# Altium PCB AP1301_20130621.PcbDoc
Units mm, origin at the board's own origin, x right, y up, seen from the top; angles counter-clockwise.
Board outline 111 x 32.5 mm, 2 copper layers (Top Layer, Bottom Layer), stack 1.601 mm thick; 65 components, 47 nets, 190 pads, 71 vias.
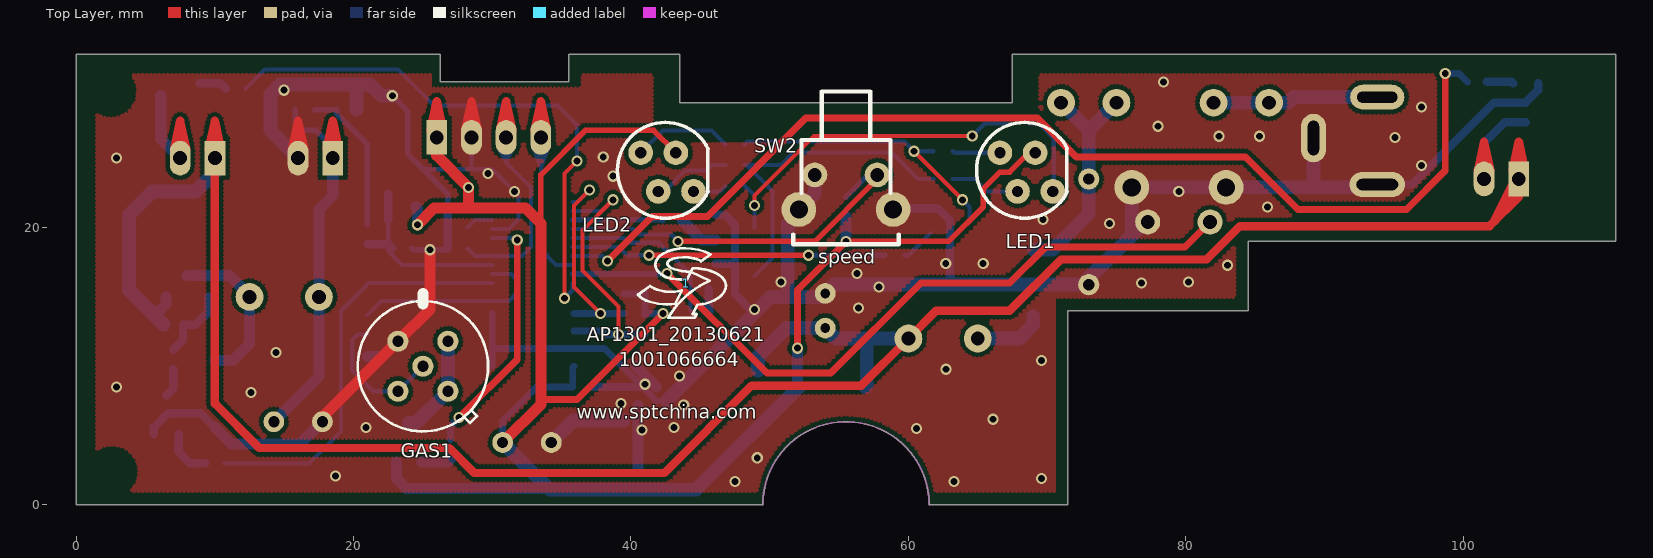
[diagram p0: Top Layer view]
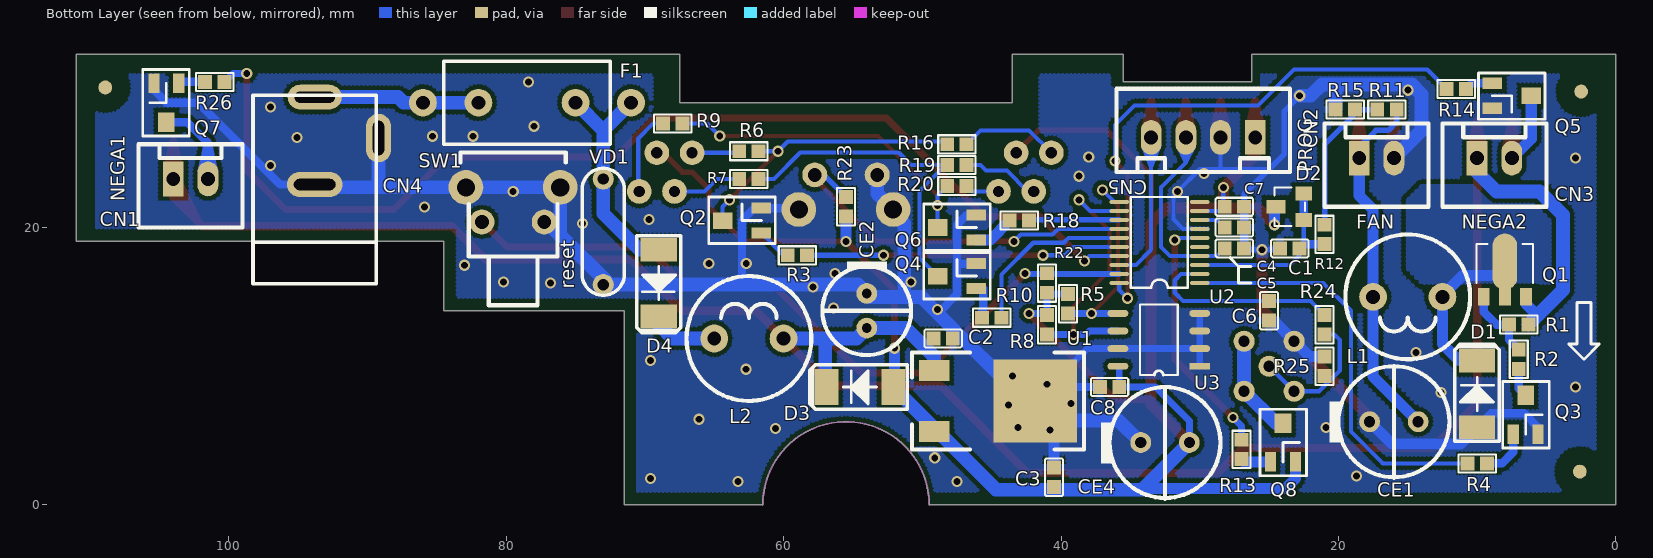
[diagram p1: Bottom Layer view, seen from below]

## Layer stack, top to bottom
Top Layer: signal copper 0.0356
Dielectric: core 1.53, FR-4, Dk 4.8
Bottom Layer: signal copper 0.0356

## Board outline
0,0 49.5,0 cw(c55.5,0) 61.5,0 71.5,0 71.5,14 84.5,14 84.5,19 111,19 111,32.5 67.5,32.5 67.5,29 43.5,29 43.5,32.5 35.5,32.5 35.5,30.5 26.25,30.5 26.25,32.5 0,32.5

## Design rules (kind name [scope] priority, off if disabled: settings)
Clearance Clearance_1 [All] p1: gap=0.3
FabricationTestPointUsage TestPointUsage [All] p1: valid=0 allowmultiple=FALSE
FabricationTestpoint Testpoint [All] p1: side=3 testpointundercomponent=TRUE minsize=1.016 maxsize=2.54 preferedsize=1.524 minholesize=0 maxholesize=1.016 preferedholesize=0.813 testpointgrid=0.025 allowsidetop=TRUE allowsidebottom=TRUE usegrid=TRUE gridtolerance=0
PlaneConnect [All] p1: planeconnectstyle=Relief reliefexpansion=0.508 reliefentries=4 reliefconductorwidth=0.4 reliefairgap=0.4
PolygonConnect PolygonConnect_1 [(HasFootprint('0603-C') OR HasFootprint('0603-R'))] p1: connectstyle=Relief reliefconductorwidth=0.5 reliefentries=4 polygonreliefangle="90 Angle" airgapwidth=0.254
PolygonConnect [All] p2: connectstyle=Direct reliefconductorwidth=0.5 reliefentries=4 polygonreliefangle="90 Angle" airgapwidth=0.254
RoomDefinition AP1301_20130621 [InComponentClass('AP1301_20130621')] p1: confinementstyle=ConfineIn formatcopy=TRUE lockcomponents=FALSE outline 112.192,1.481 121.691,1.481 121.691,9.481 112.192,9.481
RoutingVias [All] p1: holewidth=0.5 width=0.8 viastyle="Through Hole" minholewidth=0.5 minwidth=0.8 maxholewidth=4 maxwidth=5
SilkToSolderMaskClearance SilkscreenOverComponentPads [IsPad] p1: minsilkscreentomaskgap=0.254 clearancetoexposedcopper=TRUE
SolderMaskExpansion [All] p1: expansion=0.102
Width [All] p1: maxlimit=5 minlimit=0.25 preferedwidth=0.25
24 further rules are at their usual default settings.

## Components (designator, comment, footprint, x,y, rotation, side; value= is the part's Value field where it differs from the comment)
1 "AP1301_20130621" "SPT Mark" 44,16 r0 top
C1 "102" 0603-C 23.5,18.5 r0 bottom
C2 "104" 0603-C 48.5,12 r180 bottom
C3 "104" 0603-C 40.5,2 r90 bottom
C4 "104" 0603-C 27.5,18.5 r180 bottom
C5 "104" 0603-C 27.5,21.5 r180 bottom
C6 "104" 0603-C 25,14 r270 bottom
C7 "105" 0603-C 27.5,20 r0 bottom
C8 "104" 0603-C 36.5,8.5 r0 bottom
CE1 "470uF/25V" 电解电容3.5-8.0 16,6 r180 bottom
CE2 "47uF/50V" 电解电容2.5-6.3 54,14 r180 bottom
CE4 "470uF/16V" 电解电容3.5-8.0 32.5,4.5 r180 bottom
CN1 "NEGA1" XH-2 104,23.5 r0 bottom
CN2 "FAN" XH-2 18.5,25 r0 bottom
CN3 "NEGA2" XH-2 10,25 r0 bottom
CN4 "POWER" DC电源插座 93.8,29.4 r90 bottom locked
CN5 "PROG" XH-4 26,26.5 r0 bottom
D1 "SS14" 二极管_贴片 10,8 r90 bottom
D2 "BAV70" SOT23-D 23.5,21.5 r90 bottom
D3 "M7" 二极管_贴片 54.5,8.5 r0 bottom
D4 "SS24" 二极管_贴片 69,16 r270 bottom
F1 "250V/2A" 保险丝-2A/250 78.5,29 r180 bottom
GAS1 "费加罗TGS2600" 费加罗TGS6200 25,10 r0 top locked
L1 "220uH" 电感LG2-P5-D9 15,15 r0 bottom
L2 "" 电感LG2-P5-D9 62.5,12 r180 bottom
LED1 "TRILED" 三色灯2 68.5,24 r0 top locked
LED2 "TRILED" 三色灯2 42.6,24 r0 top locked
Q1 "2SA1213" 2SC2873 8,15 r180 bottom
Q2 "8050" 贴片三极管-宽 63,20.5 r90 bottom
Q3 "8050" 贴片三极管-宽 6.5,6.5 r180 bottom
Q4 "8050" 贴片三极管-宽 47.5,16.5 r90 bottom
Q5 "8050" 贴片三极管-宽 7.5,29.5 r270 bottom
Q6 "8050" 贴片三极管-宽 47.5,20 r90 bottom
Q7 "8050" 贴片三极管-宽 104.5,29 r0 bottom
Q8 "8550" 贴片三极管-宽 24,4.5 r180 bottom
R1 "10k" 0603-R 7,13 r180 bottom
R2 "2k" 0603-R 7,10.5 r90 bottom
R3 "2k" 0603-R 59,18 r0 bottom
R4 "2k" 0603-R 10,3 r180 bottom
R5 "10k" 0603-R 39.5,14.5 r90 bottom
R6 "510" 0603-R 62.5,25.5 r0 bottom
R7 "510" 0603-R 62.5,23.5 r0 bottom
R8 "10k" 0603-R 41,13 r90 bottom
R9 "510" 0603-R 68,27.5 r0 bottom
R10 "2k" 0603-R 45,13.5 r0 bottom
R11 "9.1k 1%" 0603-R 16.5,28.5 r0 bottom
R12 "1k" 0603-R 21,19.5 r270 bottom
R13 "1k" 0603-R 27,4 r270 bottom
R14 "1k" 0603-R 11.5,30 r180 bottom
R15 "6.8k 1%" 0603-R 19.5,28.5 r0 bottom
R16 "510" 0603-R 47.5,26 r180 bottom
R18 "2k" 0603-R 43,20.5 r0 bottom
R19 "510" 0603-R 47.5,24.5 r180 bottom
R20 "510" 0603-R 47.5,23 r180 bottom
R22 "10k" 0603-R 41,16 r90 bottom
R23 "10k" 0603-R 55.5,21.5 r90 bottom
R24 "1k" 0603-R 21,13 r90 bottom
R25 "100k 1%" 0603-R 21,10 r90 bottom
R26 "1k" 0603-R 101,30.5 r0 bottom
SW1 "reset" 按键-卧式_6*6*3.5 79.5,20.4 r0 bottom
SW2 "speed" 按键-卧式_6*6*5.8 55.5,23.8 r0 top locked
U1 "78M05" 78M05_TO-252 45.5,7.5 r270 bottom
U2 "STM8S003F3" STM8S103F2P6 30,16 r0 bottom
U3 "AT24C02" SOIC8 30,10 r0 bottom
VD1 "10D270K" C-7.6A 73,23.5 r90 bottom

## Footprints (in the part's own frame and the unit in brackets; to place one, negate y for a bottom-side part, rotate by r counter-clockwise, add the part's x,y. Pads: shape width x height; smd on the part's side, far side on the other; paste and mask are expansions set on the pad)
2SC2873 [mil]
  rect 34x50 smd: B(-60,0) C(0,0) E(60,0)
  oval 70x160 smd: C(0,100)
  silkscreen extent -80,40 80,150
78M05_TO-252 [mm]
  rect 1.5x2.2 smd: 1(-2.2,-3.65) 3(2.2,-3.65)
  rect 6x6 smd: 2(0,3.65)
  silkscreen extent -3.5,-5.25 3.5,7.15
0603-C [mm]
  rect 1x1 smd: 1(-0.7,0) 2(0.7,0)
  silkscreen extent -1.35,-0.65 1.35,0.65
0603-R [mm]
  rect 1x1 smd: 1(-0.7,0) 2(0.7,0)
  silkscreen extent -1.35,-0.65 1.35,0.65
C-7.6A [mil]
  round 60 hole 32: 1(0,0) 2(-300,0)
  silkscreen extent -330,-60 30,60
DC电源插座 [mm]
  oval 1.8x3.9 hole 0.8 slot 2.9 at 90 deg: 1(0,0)
  oval 3.5x1.8 hole 0.8 slot 2.5 at 0 deg: 2(-2.95,-4.6)
  oval 1.8x4 hole 0.8 slot 3 at 90 deg: 3(-6.3,0)
  silkscreen extent -13.45,-4.45 0.15,4.45, body extent -13.5,-4.5 0.2,4.5, height 11
SOIC8 [mm]
  rect 1.5x0.5 smd: 1(0,0)
  oval 1.5x0.5 smd: 2(0,-1.27) 3(0,-2.54) 4(0,-3.81) 5(5.9,-3.81) 6(5.9,-2.54) 7(5.9,-1.27) 8(5.9,0)
  silkscreen extent 1.58,-4.44 4.32,0.64
SOT23-D [mm]
  rect 1x1.2 smd: 1(-0.95,-1) 2(0.95,-1)
  rect 1x1.4 smd: 3(0,1)
  silkscreen extent -1.4,-1.1 1.4,1.1
"SPT Mark" [mm]
  silkscreen extent -3.49,-2.5 2.84,2.5
STM8S103F2P6 [mm]
  oval 1.4x0.3 smd: 1(0,0) 2(0,-0.65) 3(0,-1.3) 4(0,-1.95) 5(0,-2.6) 6(0,-3.25) 7(0,-3.9) 8(0,-4.55) 9(0,-5.2) 10(0,-5.85) 11(5.8,-5.85) 12(5.8,-5.2) 13(5.8,-4.55) 14(5.8,-3.9) 15(5.8,-3.25) 16(5.8,-2.6) 17(5.8,-1.95) 18(5.8,-1.3) 19(5.8,-0.65) 20(5.8,0)
  silkscreen extent 0.85,-6.2 4.97,0.35
XH-2 [mm]
  rect 1.5x2.5 hole 1: 1(0,0)
  oval 1.5x2.5 hole 1: 2(-2.5,0)
  silkscreen extent -5,-2.5 2.5,3.5, body extent -5.1,-2.6 2.6,3.6, height 7.5
XH-4 [mm]
  rect 1.5x2.5 hole 1: 1(0,0)
  oval 1.5x2.5 hole 1: 2(2.5,0) 3(5,0) 4(7.5,0)
  silkscreen extent -2.5,-3.5 10,2.5, body extent -2.6,-3.6 10.1,2.6, height 7.5
三色灯2 [mil]
  round 70 hole 32: 1(25,55) 2(-75,55) 3(-25,-55) 4(75,-55)
  silkscreen extent -141,-131 117,141
二极管_贴片 [mm]
  rect 1.7x2.6 smd: A(-2.4,0) K(2.4,0)
  silkscreen extent -3.4,-1.6 3.6,1.6
保险丝-2A/250 [mm]
  round 2 hole 1: 1(-7.5,0) 2(-3.5,0) 3(3.5,0) 4(7.5,0)
  silkscreen extent -6,-3 6,3
按键-卧式_6*6*3.5 [mm]
  round 1.8 hole 1: 1(-2.25,0) 2(2.25,0)
  round 2.5 hole 1.3: 3(3.4,-2.5) 4(-3.4,-2.5)
  silkscreen extent -3.8,-5 3.8,6, body extent -3.8,-5 3.8,6.03, height 11.5
按键-卧式_6*6*5.8 [mm]
  round 1.8 hole 1: 1(-2.25,0) 2(2.25,0)
  round 2.5 hole 1.3: 3(3.4,-2.5) 4(-3.4,-2.5)
  silkscreen extent -3.8,-5 3.8,6, body extent -3.8,-5 3.8,8.33, height 11.5
电感LG2-P5-D9 [mm]
  round 2 hole 1: 1(-2.5,0) 2(2.5,0)
  silkscreen extent -4.5,-4.5 4.5,4.5, body extent -4.5,-4.5 4.46,4.48, height 12.5
电解电容2.5-6.3 [mm]
  round 1.5 hole 0.711: 1(0,-1.25) 2(0,1.25)
  silkscreen extent -3.2,-3.2 3.2,3.55, body extent -3.2,-3.3 3.17,3.09, height 11.5
电解电容3.5-8.0 [mm]
  round 1.5 hole 0.8: 1(1.75,0) 2(-1.75,0)
  silkscreen extent -4.63,-4.06 4,4, body extent -4,-4 3.97,3.98, height 11.5
贴片三极管-宽 [mm]
  rect 0.8x1.4 smd: B(-0.9,-1.4) E(0.9,-1.4)
  rect 1.2x1.4 smd: C(0,1.4)
  silkscreen extent -1.65,-2.4 1.7,2.4
费加罗TGS6200 [mil]
  round 60 hole 31.5: 1(-70.98,70.98) 2(-70.98,-70.98) 3(70.98,-70.98) 4(70.98,70.98) 5(0,0)
  silkscreen extent -185,-185 185,207, body extent -185,-185 184,184, height 315

## Part data
1: library part "SPT MARK"
C1 C2 C3 C4 C5 C6 C7 C8: library part 电容
CE1 CE2 CE4: library part 电解电容
CN1 CN2 CN3: library part 插座-2
CN4: library part CON3, "Connector"
CN5 LED1 LED2: library part CON4, "Connector"
D1 D3 D4: library part 二极管-W
F1: library part 保险丝-双
GAS1: library part 费加罗TGS6200
L1: library part 电感-1
L2: library part INDUCTOR
Q1 Q8: library part 三极管-PNP
Q2 Q3 Q4 Q5 Q6 Q7: library part 三极管-NPN
R1 R2 R3 R4 R5 R6 R7 R8 R9 R10 R11 R12 R13 R14 R15 R16 R18 R19 R20 R22 R23 R24 R25 R26: library part 电阻
SW1 SW2: library part 按键-2
U1: library part KA7805, "IC?"
U2: library part STM8S103F2P6
VD1: library part 压敏电阻

## Free pads (board coordinates)
  round 1 smd far side: 1(2.5,29.8) 1(2.6,2.4) 1(108.9,30.1)
  round 3 on Bottom Solder: 2(2.5,29.8) 2(2.6,2.4) 2(108.7,29.6) 2(108.7,30.2) 2(108.9,30.1)
  round 3 on Keep-Out: 3(2.5,29.8) 3(2.6,2.4) 3(108.9,30.1)

## Via types
v1: diameter 0.8, hole 0.5, Top Layer to Bottom Layer, 71 vias

## Nets (pads, with @x,y where several pads share a name; then routed paths per layer and width w, separated by ;. In a path a pad name is that pad's centre, name@x,y a point inside that pad or via, vN(x,y) a via of type N, cw(c..) or ccw(c..) an arc to the next point about the centre after c; other vN are vias at no path point)
+5V: C3.1 C5.1 C8.1 CE4.1 CN5.1 D2.3 D3.A LED1.1 LED2.1 Q8.E R5.2 R8.2 R22.1 R23.1 U1.3 U2.9 U3.8 | length 171.6
  Top Layer w0.4: 33.5,20.3 33.5,23.8 36.7,27 41.632,27 LED2.1 ; v1(55.5,19) 62.9,19 65.4,21.5 65.4,22.8 66.592,23.992 67.292,23.992 68.697,25.397 LED1.1
  Top Layer w0.5: 33.5,7.25 33.85,7.6 36.1,7.6 v1(42.3,13.8) ; v1(52,11.3) 52,15.5 v1(55.5,19)
  Top Layer w0.6: CN5.1@25.553,27.048 26,29.1 ; CN5.1@26,27 26,29.1 ; CN5.1@26.447,27.048 26,29.1 ; CN5.1@25.552,26.946 26,29.1 ; CN5.1@25.552,26.946 26,29.1 ; CN5.1@25.552,26.946 26,29.1 ; CN5.1@26,26.9 26,29.1 ; CN5.1@26,26.9 26,29.1 ; CN5.1@26,26.9 26,29.1 ; 26,29.1 CN5.1@26.448,26.946 ; 26,29.1 CN5.1@26.448,26.946 ; 26,29.1 CN5.1@26.448,26.946
  Top Layer w0.8: v1(24.6,20.2) 25.8,21.4 28.3,21.4 ; 26,25.2 v1(28.3,22.9) 28.3,21.4 ; CE4.1 33.5,7.25 33.5,20.3 32.4,21.4 28.3,21.4
  Bottom Layer w0.3: C5.1@28.3,21.4 28.5,21.2 U2.9 ; C5.1@28.3,21.5 v1(28.3,22.9)
  Bottom Layer w0.5: CE4.1 30.75,6.05 33.2,8.5 C8.1 35.8,9.9 U3.8 ; R5.2 40.9,15.2 R22.1 R8.2 41.1,13.8 v1(42.3,13.8)
  Bottom Layer w0.8: Q8.E 23.1,1.9 23.8,1.2 34.05,1.2 34.15,1.1 ; D2.3 24.6,21.4 v1(24.6,20.2) ; v1(52,11.3) 52,8.6 D3.A ; v1(55.5,19) R23.1
  Bottom Layer w1: CE4.1 34.05,1.2 ; 34.15,1.1 44.7,1.1 D3.A
+12V: C2.1 CE2.1 CN1.1 CN3.1 D3.K L2.2 Q1.E R1.2 U1.1 | length 200.9
  Top Layer w0.6: CN3.1@9.553,25.648 10,27.7 ; CN3.1 10,7.3 13.2,4.1 26.9,4.1 28.7,2.3 42.4,2.3 48.7,8.6 56.6,8.6 L2.2 62,14 67.3,14 71,17.7 81.5,17.7 83.9,20.1 101.9,20.1 104,22.2 CN1.1 ; CN3.1@10,25.6 10,27.7 ; CN3.1@10.447,25.648 10,27.7 ; CN1.1@103.553,24.148 104,26.2 ; CN1.1@103.613,23.229 102.193,20.393 ; CN1.1@104,23 102.193,20.393 ; CN1.1@104,24.1 104,26.2 ; CN1.1@104.351,22.718 102.193,20.393 ; CN1.1@104.447,24.148 104,26.2 ; CN1.1@103.552,24.046 104,26.2 ; CN1.1@103.552,24.046 104,26.2 ; CN1.1@103.552,24.046 104,26.2 ; CN1.1@104,24 104,26.2 ; CN1.1@104,24 104,26.2 ; CN1.1@104,24 104,26.2 ; 104,26.2 CN1.1@104.448,24.046 ; 104,26.2 CN1.1@104.448,24.046 ; 104,26.2 CN1.1@104.448,24.046
  Bottom Layer w0.8: 5.65,13.65 6.476,14.476 Q1.E
  Bottom Layer w1: R1.2 5.65,13.65 3.8,15.5 3.8,20.9 5.5,22.6 8.6,22.6 10,24 CN3.1 ; U1.1 49.15,10.7 51.2,12.75 CE2.1 54.75,12 57,12 ; D3.K 57,8.6 57,12 ; L2.2 57,12
+12V_IN: CN4.1 F1.1 F1.2 | length 14.6
  Bottom Layer w1: F1.2 F1.1 ; 83.4,29 F1.1 ; CN4.1 87.8,29.4 87.4,29 F1.1
AD_VFAN: C1.1 D2.1 D2.2 R12.2 U2.3 | length 14
  Bottom Layer w0.3: D2.1 22.5,18.8 22.5,18.3 23.5,17.3 U2.3
  Bottom Layer w0.6: R12.2 22.5,18.8 C1.1 ; D2.1 D2.2
EE_SCL: R8.1 U2.12 U3.6 | length 20.1
  Top Layer w0.3: v1(38.7,22) 36.5,19.8 36.5,16.9 39.1,14.3 v1(39.1,12.3)
  Bottom Layer w0.3: U2.12 37.9,21.2 v1(38.7,22)
  Bottom Layer w0.5: U3.6 37.96,12.54 38.2,12.3 v1(39.1,12.3) R8.1
EE_SDA: R5.1 U2.11 U3.5 | length 15.3
  Top Layer w0.3: v1(37.017,22.717) 35.9,21.6 35.9,15.7 v1(37.8,13.8)
  Bottom Layer w0.3: U2.11 36.15,21.85 v1(37.017,22.717)
  Bottom Layer w0.5: U3.5 35.91,13.8 v1(37.8,13.8) R5.1
GAS: C6.1 R24.2 U2.2 | length 14.3
  Bottom Layer w0.3: R24.2 22,14.7 31.2,14.7 31.8,15.3 31.8,16.2 31.35,16.65 U2.2
GAS_POWER: R13.1 U2.6 | length 18.3
  Top Layer w0.5: v1(27.6,6.3) 31.8,10.5 v1(31.8,19.1)
  Bottom Layer w0.3: U2.6 31.65,19.25 v1(31.8,19.1)
  Bottom Layer w0.5: R13.1 27,5.7 v1(27.6,6.3)
GND: C1.2 C2.2 C3.2 C4.2 C5.2 C6.2 C7.1 C8.2 CE1.2 CE2.2 CE4.2 CN2.2 CN4.2 CN4.3 CN5.2 D1.A GAS1.1 Q2.E Q3.E Q4.E Q5.E Q6.E Q7.E R15.2 R25.2 SW1.1 SW1.3 SW1.4 SW2.1 SW2.3 SW2.4 U1.2 U2.7 U3.1 U3.2 U3.3 U3.4 U3.7 VD1.2 | length 263.6
  Top Layer w0.6: CN2.2@15.553,25.648 16,27.7 ; CN2.2@16,25.6 16,27.7 ; CN2.2@16.447,25.648 16,27.7 ; CN5.2@28.053,27.048 28.5,29.1 ; CN5.2@28.5,27 28.5,29.1 ; CN5.2@28.947,27.048 28.5,29.1 ; CN5.2@28.052,26.946 28.5,29.1 ; CN5.2@28.052,26.946 28.5,29.1 ; CN5.2@28.052,26.946 28.5,29.1 ; CN5.2@28.5,26.9 28.5,29.1 ; CN5.2@28.5,26.9 28.5,29.1 ; CN5.2@28.5,26.9 28.5,29.1 ; 28.5,29.1 CN5.2@28.948,26.946 ; 28.5,29.1 CN5.2@28.948,26.946 ; 28.5,29.1 CN5.2@28.948,26.946
  Top Layer w0.8: CE1.2 17.75,6.356 GAS1.1 25.5,14.106 v1(25.5,18.4)
  Bottom Layer w0.3: 25,24.2 28.5,24.2 ; CN5.2 28.5,24.2 ; U2.7 31.2,19.9 31.9,20.6 31.9,22.3 v1(31.608,22.592) 30,24.2 28.5,24.2
  Bottom Layer w0.4: v1(22.792,29.5) 23.9,28.392 23.9,27.2 23.9,25.3 25,24.2 26.8,22.4 C5.2 ; C1.2 24.3,18.4 v1(25.5,18.4) 26.7,18.4 C4.2
  Bottom Layer w0.5: U3.1 U3.2 ; U3.4 U3.3 U3.2 ; U1.2 40.85,8.5 38.08,11.27 U3.7 U3.2
  Bottom Layer w0.6: Q3.E 5.6,5.6 6.6,6.6 9,6.6 D1.A ; C4.2 C7.1 C5.2 ; C8.2 U1.2@40.85,8.5 ; Q4.E 47.5,17.4 ; Q6.E 46.8,20.9 47.5,20.2 47.5,17.4 ; v1@48.884,13.816 47.5,15.2 47.5,17.4 ; SW2.3 59,21.4 Q2.E 62.1,21.4 63,20.5 63,16.38 63.5,15.88 ; CN4.3 96.3,23.1 102.2,29 104.5,29 105.4,29.9 Q7.E
  Bottom Layer w0.8: D1.A 11.2,4.4 16.15,4.4 CE1.2 ; R25.2 22.094,10.7 GAS1.1 23.847,12.453 C6.2@24.647,13.253 ; U1.2@40.35,10 U1.2@41.85,8.5 ; C3.2 U1.2@40.5,7.15
  Bottom Layer w1: CN2.2 14,27 14,29.6 14.7,30.3 20.2,30.3 ; R15.2 20.2,30.3 ; v1(22.792,29.5) 22,29.5 21.2,30.3 20.2,30.3 ; CE4.2 35.85,6.1 U1.2@39.45,6.1 ; U1.2@42.569,7.5 48.884,13.816 50.069,15 51.2,15 ; SW2.1 53.25,22.45 SW2.4 52.1,21.1 51.3,20.3 51.3,15.1 51.2,15 ; 66.48,15.88 67.7,15.88 ; VD1.2@72.73,15.88 VD1.2@72.5,15.88 ; CN4.2 89.2,23 89.3,22.9 ; CN4.3@92.55,23.1 CN4.3@93.2,23.1 ; CN4.3 CN4.3@93.2,23.1 ; 51.2,15 53.75,15 CE2.2 54.63,15.88 63.5,15.88 67.7,15.88 ; 67.7,15.88 VD1.2@72.5,15.88 ; VD1.2@72.5,15.88 72.58,15.88 77.1,20.4 SW1.1 76.1,20.4 ; VD1.2@72.5,15.88 76.1,19.48 76.1,20.4 ; 76.1,20.4 SW1.4 SW1.3 89.3,22.9 ; 89.3,22.9 93,22.9 CN4.3@93.2,23.1
  other v1: 47.5,1.681 63.292,1.7 69.592,1.9 18.7,2.1 49.1,3.4 40.8,5.4 60.592,5.5 20.9,5.581 43.1,5.581 66.1,6.181 43.8,7.2 39.292,7.3 12.592,8.1 2.9,8.5 41,8.7 43.5,9.3 62.7,9.781 69.592,10.4 14.4,10.981 48.892,14.1 56.392,14.2 57.892,15.7 76.792,16 50.8,16.081 80.2,16.081 56.3,16.681 83,17.281 62.692,17.4 65.392,17.4 74.5,20.281 69.7,20.581 85.9,21.481 79.492,22.6 38.692,23.7 29.692,23.9 97,24.481 2.9,25 38,25.081 95.092,26.5 82.4,26.581 85.3,26.581 77.992,27.3 97,28.681 14.992,29.9 78.4,30.481
KEY_FILTER_RESET: R22.2 SW1.2 U2.19 | length 53.4
  Top Layer w0.5: v1(42.6,16.7) 49.8,9.5 54.4,9.5 60.9,16 67.3,16 69.9,18.6 79.95,18.6 SW1.2
  Bottom Layer w0.4: U2.19 v1@42.6,16.65
KEY_SPEED: R23.2 SW2.2 U2.14 | length 27.4
  Top Layer w0.4: v1(43.4,19) 53.25,19 57.75,23.5 SW2.2
  Bottom Layer w0.3: U2.14 40.2,19.9 40.6,19.5 42.9,19.5 v1(43.4,19)
  Bottom Layer w0.4: R23.2 57.1,23.8 SW2.2
NEGA1: R26.1 U2.17 | length 81.6
  Top Layer w0.5: v1(38.3,17.6) 41.5,20.8 45.5,20.8 52.6,27.9 69.3,27.9 72.1,25.1 84.3,25.1 88.1,21.3 95.9,21.3 98.7,24.1 v1(98.7,31.1)
  Bottom Layer w0.3: 37.35,17.95 U2.17 37.95,17.95 v1(38.3,17.6)
  Bottom Layer w0.5: v1(98.7,31.1) 99.7,31.1 R26.1
NEGA2: R14.1 U2.20 | length 40.4
  Top Layer w0.3: v1(35.2,14.9) 35.2,23.9 v1(36.1,24.8)
  Bottom Layer w0.3: R14.1 13.6,31.4 23.2,31.4 25.8,28.8 34.7,28.8 36.1,27.4 v1(36.1,24.8) ; v1(35.2,14.9) 35.8,15.5 U2.20
NetC7_2: C7.2 U2.8 | length 2
  Bottom Layer w0.3: C7.2 28.75,20.55 U2.8
NetCN1_2: CN1.2 Q7.C | length 18.8
  Top Layer w0.6: CN1.2@101.053,24.148 101.5,26.2 ; CN1.2@101.5,24.1 101.5,26.2 ; CN1.2@101.947,24.148 101.5,26.2
  Bottom Layer w0.6: CN1.2@101.053,24.048 101.5,26.1 ; CN1.2 101.5,26.1 ; CN1.2@101.5,24 101.5,26.1 ; CN1.2@101.947,24.048 101.5,26.1 ; Q7.C 103,27.6 101.5,26.1
NetCN3_2: CN3.2 Q5.C | length 11.4
  Top Layer w0.6: CN3.2@7.053,25.648 7.5,27.7 ; CN3.2@7.5,25.6 7.5,27.7 ; CN3.2@7.947,25.648 7.5,27.7
  Bottom Layer w0.8: Q5.C 6.1,26.4 CN3.2
NetD1_K: D1.K L1.1 Q1.C | length 11.6
  Bottom Layer w0.8: Q1.C@8,16.54 11.06,16.54 12.5,15.1 L1.1 12.5,11.6 11.3,10.4 D1.K
NetD4_A: D4.A F1.3 F1.4 VD1.1 | length 16.7
  Bottom Layer w1: D4.A 70.4,18.4 73,21 VD1.1 73,27 ; F1.4 73,27 ; F1.3 73,27
NetD4_K: D4.K L2.1 | length 5
  Bottom Layer w1: L2.1 68,12 69,13 D4.K
NetGAS1_2: GAS1.2 GAS1.5 R24.1 R25.1 | length 9.9
  Bottom Layer w0.3: R24.1 20.3,12.3 19.9,11.9 19.9,9.7 21.403,8.197 GAS1.2 GAS1.5
NetGAS1_3: GAS1.3 GAS1.4 Q8.C | length 7.4
  Bottom Layer w1: Q8.C 24.506,5.9 GAS1.3 GAS1.4
NetLED1_2: LED1.2 R6.2 | length 3.4
  Bottom Layer w0.3: R6.2 63.303,25.397 LED1.2
NetLED1_3: LED1.3 R7.2 | length 5
  Bottom Layer w0.3: R7.2 64.8,23.5 65.697,22.603 LED1.3
NetLED1_4: LED1.4 R9.2 | length 6.5
  Bottom Layer w0.3: R9.2 69.4,27.5 70.474,26.426 70.474,22.672 LED1.4 LED1.4@70.405,22.205
NetLED2_2: LED2.2 R16.2 | length 7.2
  Bottom Layer w0.3: LED2.2 42.298,27 45.8,27 R16.2
NetLED2_3: LED2.3 R19.2 | length 5.6
  Bottom Layer w0.3: LED2.3 42.403,22.603 43.9,24.1 45.4,24.1 45.8,24.5 R19.2
NetLED2_4: LED2.4 R20.2 | length 2.5
  Bottom Layer w0.3: LED2.4 46.403,22.603 R20.2
NetQ1_B: Q1.B R1.1 R2.2 | length 5.4
  Bottom Layer w0.6: R2.2 7.7,11.9 R1.1 8.6,13 9.524,13.924 Q1.B
NetQ2_B: Q2.B R3.2 | length 2.6
  Bottom Layer w0.3: R3.2 60,18 Q2.B
NetQ2_C: Q2.C R6.1 R16.1 | length 20.6
  Top Layer w0.3: v1(60.4,25.5) v1(63.9,22)
  Bottom Layer w0.3: R16.1 48.4,26.2 59.7,26.2 v1(60.4,25.5) R6.1 ; v1(63.9,22) 64.4,21.5 Q2.C
NetQ3_B: Q3.B R4.2 | length 3.5
  Bottom Layer w0.6: Q3.B 7.4,3.8 8.2,3 R4.2
NetQ3_C: Q3.C R2.1 | length 2.1
  Bottom Layer w0.6: Q3.C 7,8.4 R2.1
NetQ4_B: Q4.B R10.2 | length 1.6
  Bottom Layer w0.6: Q4.B@45.6,15.6 45.6,14.1 R10.2@45.7,14
NetQ4_C: Q4.C R7.1 R19.1 | length 24.1
  Bottom Layer w0.3: R19.1 R19.1@48.336,24.5 ; Q4.C 50.2,17.8 50.2,22.636 R19.1@48.336,24.5 ; R7.1 60.7,23.5 58.8,25.4 51.7,25.4 50.8,24.5 R19.1@48.336,24.5
NetQ5_B: Q5.B R14.2 | length 2.1
  Bottom Layer w0.6: Q5.B 10.4,30.4 R14.2
NetQ6_B: Q6.B R18.2 | length 3
  Bottom Layer w0.8: R18.2 45.1,19.1 Q6.B
NetQ6_C: Q6.C R9.1 R20.1 | length 24.5
  Top Layer w0.3: v1(48.9,21.6) 48.9,22.3 53.2,26.6 v1(64.6,26.6)
  Bottom Layer w0.3: R20.1 48.9,22.3 v1(48.9,21.6) Q6.C ; v1(64.6,26.6) 65.5,27.5 R9.1
NetQ7_B: Q7.B R26.2 | length 1.9
  Bottom Layer w0.6: R26.2 103.5,30.5 Q7.B
NetQ8_B: Q8.B R13.2 | length 2.2
  Bottom Layer w0.8: Q8.B 26.8,3.1 R13.2
NetR11_2: R11.2 R12.1 R15.1 | length 10.8
  Bottom Layer w0.4: R11.2 R15.1 18.8,28.193 21,25.993 R12.1
NRST: C4.1 CN5.3 U2.4 | length 121.9
  Top Layer w0.6: CN5.3@30.552,26.946 31,29.1 ; CN5.3@30.552,26.946 31,29.1 ; CN5.3@30.552,26.946 31,29.1 ; CN5.3@30.553,27.048 31,29.1 ; CN5.3@30.553,27.048 31,29.1 ; CN5.3@30.553,27.048 31,29.1 ; CN5.3@30.553,27.048 31,29.1 ; CN5.3@30.553,27.048 31,29.1 ; CN5.3@30.553,27.048 31,29.1 ; CN5.3@30.553,27.048 31,29.1 ; CN5.3@30.553,27.048 31,29.1 ; CN5.3@30.553,27.048 31,29.1 ; CN5.3@30.553,27.048 31,29.1 ; CN5.3@30.553,27.048 31,29.1 ; CN5.3@30.553,27.048 31,29.1 ; CN5.3@30.553,27.048 31,29.1 ; CN5.3@31,26.9 31,29.1 ; CN5.3@31,26.9 31,29.1 ; CN5.3@31,26.9 31,29.1 ; CN5.3@31,27 31,29.1 ; CN5.3@31,27 31,29.1 ; CN5.3@31,27 31,29.1 ; CN5.3@31,27 31,29.1 ; CN5.3@31,27 31,29.1 ; CN5.3@31,27 31,29.1 ; CN5.3@31,27 31,29.1 ; CN5.3@31,27 31,29.1 ; CN5.3@31,27 31,29.1 ; CN5.3@31,27 31,29.1 ; CN5.3@31,27 31,29.1 ; CN5.3@31,27 31,29.1 ; CN5.3@31,27 31,29.1 ; 31,29.1 CN5.3@31.447,27.048 ; 31,29.1 CN5.3@31.447,27.048 ; 31,29.1 CN5.3@31.447,27.048 ; 31,29.1 CN5.3@31.447,27.048 ; 31,29.1 CN5.3@31.447,27.048 ; 31,29.1 CN5.3@31.447,27.048 ; 31,29.1 CN5.3@31.447,27.048 ; 31,29.1 CN5.3@31.447,27.048 ; 31,29.1 CN5.3@31.447,27.048 ; 31,29.1 CN5.3@31.447,27.048 ; 31,29.1 CN5.3@31.447,27.048 ; 31,29.1 CN5.3@31.447,27.048 ; 31,29.1 CN5.3@31.447,27.048 ; 31,29.1 CN5.3@31.448,26.946 ; 31,29.1 CN5.3@31.448,26.946 ; 31,29.1 CN5.3@31.448,26.946
  Bottom Layer w0.3: C4.1 28.75,17.95 U2.4 32.15,17.95 32.8,18.6 32.8,22.9 31,24.7 ; CN5.3@30.416,25.862 31,24.7 ; CN5.3@30.702,25.965 31,24.7 ; CN5.3@31,26 31,24.7 ; CN5.3 31,24.7 ; CN5.3@31.298,25.965 31,24.7 ; CN5.3@31.584,25.862 31,24.7
PWM_VFAN: R4.1 U2.1 | length 29.8
  Bottom Layer w0.3: R4.1 16.8,3 19.1,5.3 19.1,14 21.1,16 U2.1
SWIM: CN5.4 U2.18 | length 120.8
  Top Layer w0.6: CN5.4@33.053,27.048 33.5,29.1 ; CN5.4@33.052,26.946 33.5,29.1 ; CN5.4@33.052,26.946 33.5,29.1 ; CN5.4@33.052,26.946 33.5,29.1 ; CN5.4@33.053,27.048 33.5,29.1 ; CN5.4@33.053,27.048 33.5,29.1 ; CN5.4@33.053,27.048 33.5,29.1 ; CN5.4@33.053,27.048 33.5,29.1 ; CN5.4@33.053,27.048 33.5,29.1 ; CN5.4@33.053,27.048 33.5,29.1 ; CN5.4@33.053,27.048 33.5,29.1 ; CN5.4@33.053,27.048 33.5,29.1 ; CN5.4@33.053,27.048 33.5,29.1 ; CN5.4@33.053,27.048 33.5,29.1 ; CN5.4@33.053,27.048 33.5,29.1 ; CN5.4@33.053,27.048 33.5,29.1 ; CN5.4@33.5,26.9 33.5,29.1 ; CN5.4@33.5,26.9 33.5,29.1 ; CN5.4@33.5,26.9 33.5,29.1 ; CN5.4@33.5,27 33.5,29.1 ; CN5.4@33.5,27 33.5,29.1 ; CN5.4@33.5,27 33.5,29.1 ; CN5.4@33.5,27 33.5,29.1 ; CN5.4@33.5,27 33.5,29.1 ; CN5.4@33.5,27 33.5,29.1 ; CN5.4@33.5,27 33.5,29.1 ; CN5.4@33.5,27 33.5,29.1 ; CN5.4@33.5,27 33.5,29.1 ; CN5.4@33.5,27 33.5,29.1 ; CN5.4@33.5,27 33.5,29.1 ; CN5.4@33.5,27 33.5,29.1 ; CN5.4@33.5,27 33.5,29.1 ; 33.5,29.1 CN5.4@33.947,27.048 ; 33.5,29.1 CN5.4@33.947,27.048 ; 33.5,29.1 CN5.4@33.947,27.048 ; 33.5,29.1 CN5.4@33.947,27.048 ; 33.5,29.1 CN5.4@33.947,27.048 ; 33.5,29.1 CN5.4@33.947,27.048 ; 33.5,29.1 CN5.4@33.947,27.048 ; 33.5,29.1 CN5.4@33.947,27.048 ; 33.5,29.1 CN5.4@33.947,27.048 ; 33.5,29.1 CN5.4@33.947,27.048 ; 33.5,29.1 CN5.4@33.947,27.048 ; 33.5,29.1 CN5.4@33.947,27.048 ; 33.5,29.1 CN5.4@33.947,27.048 ; 33.5,29.1 CN5.4@33.948,26.946 ; 33.5,29.1 CN5.4@33.948,26.946 ; 33.5,29.1 CN5.4@33.948,26.946
  Bottom Layer w0.3: CN5.4@32.91,25.891 33.5,24.35 ; CN5.4@33.201,25.973 33.5,24.35 ; CN5.4@33.5,26 33.5,24.35 ; CN5.4 33.5,18.4 34.6,17.3 U2.18 ; CN5.4@33.799,25.973 33.5,24.35 ; CN5.4@34.09,25.891 33.5,24.35
TRILED_1: R3.1 U2.16 | length 22.7
  Top Layer w0.4: v1(41.3,18) v1(52.8,18)
  Bottom Layer w0.3: U2.16 39.1,18.6 39.7,18 v1(41.3,18)
  Bottom Layer w0.4: v1(52.8,18) R3.1
TRILED_2: R10.1 U2.15 | length 12.2
  Bottom Layer w0.3: U2.15 39.45,19.25 39.8,18.9 42,18.9 44.3,16.6 R10.1@44.3,14
TRILED_3: R18.1 U2.13 | length 6.5
  Bottom Layer w0.4: U2.13 42.25,20.55 R18.1
VFAN: CE1.1 CN2.1 L1.2 R11.1 | length 32.4
  Top Layer w0.6: CN2.1@18.053,25.648 18.5,27.7 ; CN2.1@18.5,25.6 18.5,27.7 ; CN2.1@18.947,25.648 18.5,27.7
  Bottom Layer w0.4: R11.1 15.8,27.6 16.4,27 17.3,27 18.5,25.8 CN2.1
  Bottom Layer w0.8: CE1.1@14.25,6.2 CE1.1 17.5,9.25 L1.2 17.5,21.3 18.5,22.3 CN2.1
pads on no net: U2.5 U2.10

## Polygon pours and split planes (outlines as drawn)
GND on Top Layer "BottomSolder-No Net" (hatched 90Degree grid 0.3 track 0.3, remove dead copper, pour order 1001): 1.5,31 1.5,1 48.5,1 70.5,1 70.5,15 83.5,15 83.5,20 109.5,20 109.5,31 69.5,31 69.5,26 41.5,26 41.5,31 36.5,31 36.5,30 25.5,30 25.5,31 1.5,31
GND on Bottom Layer "BottomSolder-No Net" (hatched 90Degree grid 0.3 track 0.3, remove dead copper, pour order 1002): 109.5,31 109.5,20 83.5,20 83.5,15 70.5,15 70.5,1 1.5,1 1.5,31 25.5,31 25.5,30 36.5,30 36.5,31 41.5,31 41.5,26 69.5,26 69.5,31 109.5,31
NetD1_K on Bottom Layer "BottomSolder-No Net" (hatched 90Degree grid 0.3 track 0.3, remove dead copper, pour order 1000): 15,22 15,17 14,16 3.8,16 3.8,20.9 4.9,22 5.9,23 14,23 15,22

## Keep-outs
Keep-Out Layer:
  lines w0.127: 49.5,0 cw(c55.5,0) 61.5,0

## Other copper
Top Layer:
  pour cut-out: 31.5,27 31.5,26 32.5,26 32.5,27

## Silkscreen, mask and mechanical layers (free items; w line width, h text height)
Top Overlay:
  text "1001066664" at 39.1,10 h1
  text "www.sptchina.com" at 36.1,6.2 h1
Bottom Overlay:
  lines w0.2: 26.3,16 27.2,16 27.2,17.2 ; 26.3,17.2 27.2,17.2 ; 27.8,17.85 27.8,17.8 27.2,17.2 ; 1.2,11.6 2.3,10.5 3.4,11.6 2.8,11.6 2.8,14.6 1.8,14.6 1.8,11.6 1.2,11.6
Top Solder:
  lines w0.6: 7.053,25.648 7.5,27.7 ; 7.5,25.6 7.5,27.7 ; 7.947,25.648 7.5,27.7 ; 15.553,25.648 16,27.7 ; 16,25.6 16,27.7 ; 16.447,25.648 16,27.7 ; 18.053,25.648 18.5,27.7 ; 18.5,25.6 18.5,27.7 ; 18.947,25.648 18.5,27.7 ; 25.553,27.048 26,29.1 ; 26,27 26,29.1 ; 26.447,27.048 26,29.1 ; 28.053,27.048 28.5,29.1 ; 28.5,27 28.5,29.1 ; 28.947,27.048 28.5,29.1 ; 30.553,27.048 31,29.1 ; 31,27 31,29.1 ; 31.447,27.048 31,29.1 ; 33.053,27.048 33.5,29.1 ; 33.5,27 33.5,29.1 ; 33.947,27.048 33.5,29.1 ; 101.053,24.148 101.5,26.2 ; 101.5,24.1 101.5,26.2 ; 101.947,24.148 101.5,26.2 ; 103.553,24.148 104,26.2 ; 104,24.1 104,26.2 ; 104.447,24.148 104,26.2 ; 10,27.7 10,25.6 10,27.7 ; 10,27.7 10.447,25.648 10,27.7 ; 10,27.7 9.553,25.648 10,27.7
Mechanical 1:
  lines w0.127: 0,32.5 49.5,32.5 cw(c55.5,32.5) 61.5,32.5 71.5,32.5 71.5,46.5 84.5,46.5 84.5,51.5 111,51.5 111,65 67.5,65 67.5,61.5 43.5,61.5 43.5,65 35.5,65 35.5,63 26.25,63 26.25,65 0,65 ; 0,32.5 0,65 ; 0,32.5 0,0 49.5,0 cw(c55.5,0) 61.5,0 71.5,0 71.5,14 84.5,14 84.5,19 111,19 111,32.5 67.5,32.5 67.5,29 43.5,29 43.5,32.5 35.5,32.5 35.5,30.5 26.25,30.5 26.25,32.5 0,32.5 ; 0,65 49.5,65 cw(c55.5,65) 61.5,65 71.5,65 71.5,79 84.5,79 84.5,84 111,84 111,97.5 67.5,97.5 67.5,94 43.5,94 43.5,97.5 35.5,97.5 35.5,95.5 26.25,95.5 26.25,97.5 0,97.5 ; 0,65 0,97.5 ; 0,97.5 49.5,97.5 cw(c55.5,97.5) 61.5,97.5 71.5,97.5 71.5,111.5 84.5,111.5 84.5,116.5 111,116.5 111,130 67.5,130 67.5,126.5 43.5,126.5 43.5,130 35.5,130 35.5,128 26.25,128 26.25,130 0,130 0,97.5
Mechanical 4:
  drawing of 7416 lines, arcs and shapes, not listed

## Dimensions
0,130 to 0,0 on Mechanical 2
111,32.5 to 0,32.5 on Mechanical 2